# EAGLE board ARE_adaptadores_final (EAGLE 6.1), part 1 of 2
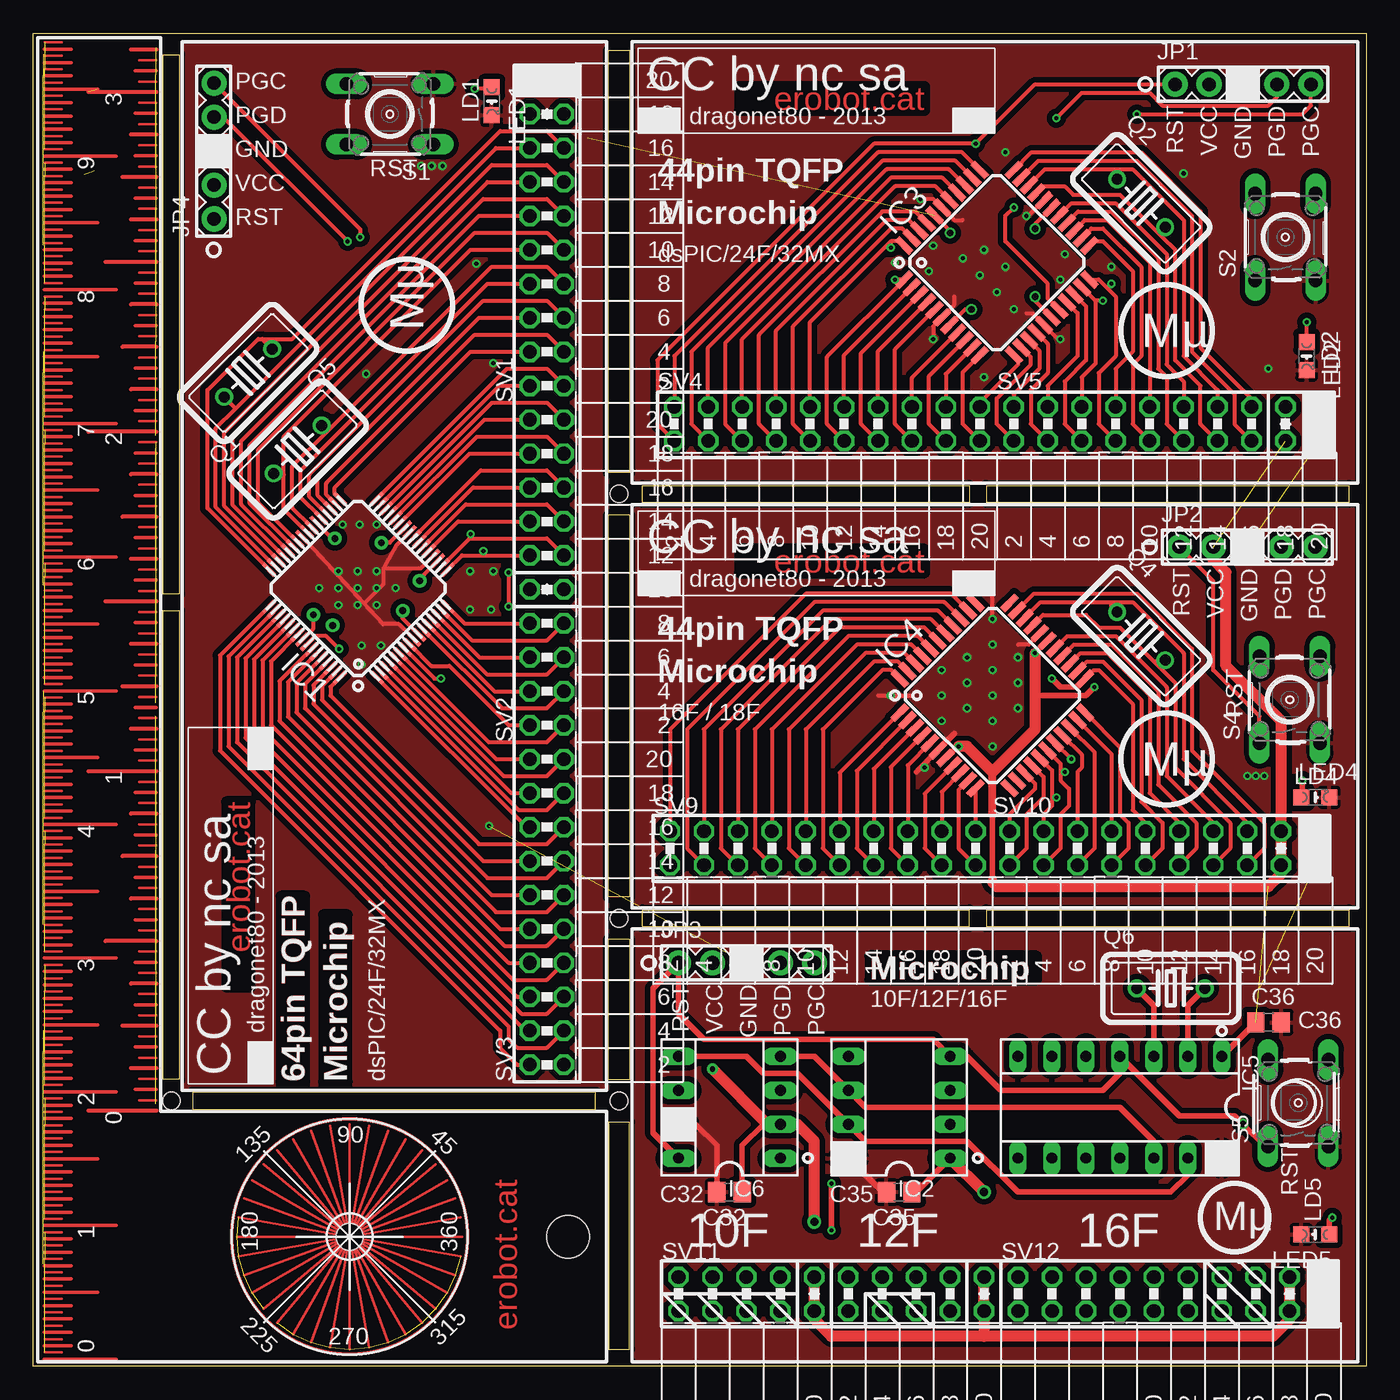
[diagram p0: board, top side]
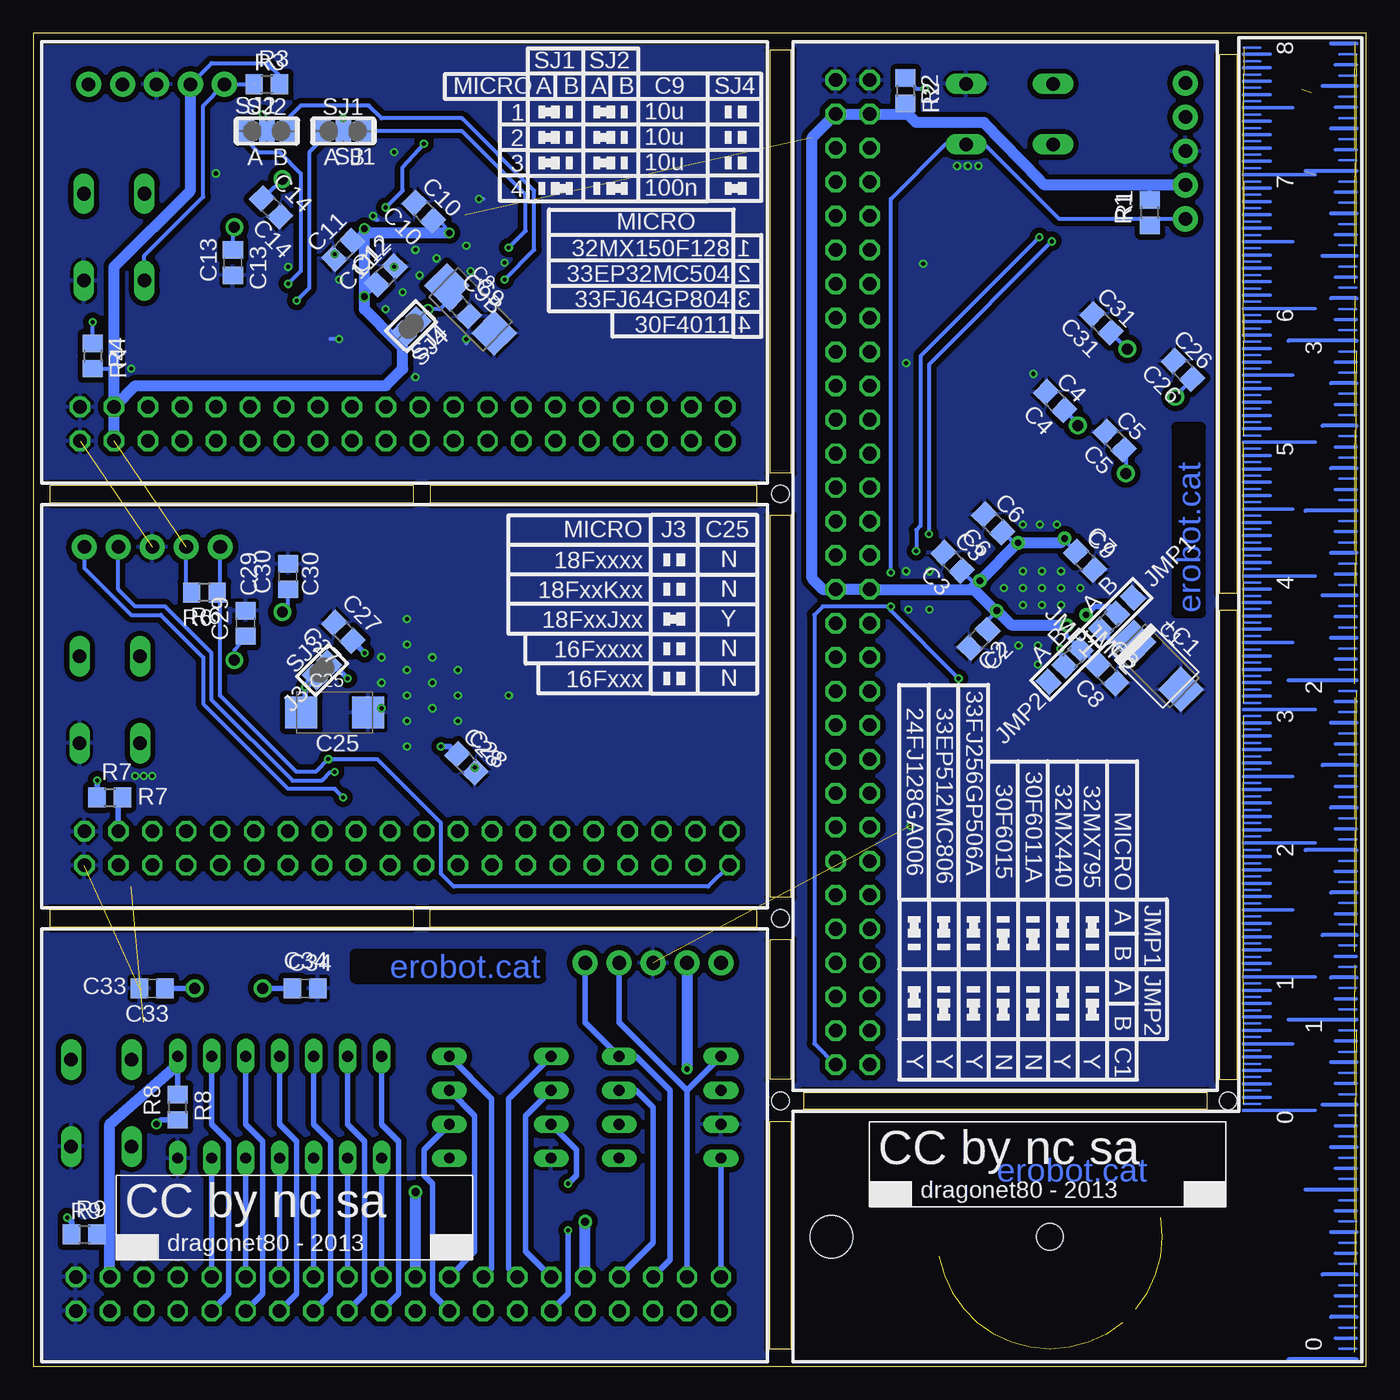
[diagram p1: board, bottom side, seen from below]

Size 99.69 x 99.69 mm. Coordinates in mm from the lower left corner, seen from the top.
Outline: 99.69,99.69 99.69,0 0,0 0,99.69 99.69,99.69
Outline: 9.68,98.11 9.68,57.78 10.95,57.78 10.95,98.11 9.68,98.11
Outline: 9.68,56.52 9.68,21.43 10.95,21.43 10.95,56.52 9.68,56.52
Outline: 11.91,19.21 42.07,19.21 42.07,20.48 11.91,20.48 11.91,19.21
Outline: 43.02,18.26 43.02,1.27 44.61,1.27 44.61,18.26 43.02,18.26
Outline: 43.02,21.43 43.02,31.91 44.61,31.91 44.61,21.43 43.02,21.43
Outline: 43.02,35.08 43.02,63.66 44.61,63.66 44.61,35.08 43.02,35.08
Outline: 43.02,66.83 43.02,98.42 44.61,98.42 44.61,66.83 43.02,66.83
Outline: 45.56,65.88 70.01,65.88 70.01,64.61 45.56,64.61 45.56,65.88
Outline: 71.28,65.88 98.42,65.88 98.42,64.61 71.28,64.61 71.28,65.88
Outline: 45.56,34.13 70.01,34.13 70.01,32.86 45.56,32.86 45.56,34.13
Outline: 71.28,34.13 98.42,34.13 98.42,32.86 71.28,32.86 71.28,34.13
Copper layers (1*16): Top 0.035mm / dielectric 1.5mm / Bottom 0.035mm
Design rules: minimum track width 6mil, minimum drill 12mil, track to track 6mil, track to pad 6mil, pad to pad 6mil, via to via 6mil, smd to smd 0mil, copper to edge 10mil, drill to drill 10mil, minimum pad ring 10mil, minimum via ring 6mil, stop-mask expansion 2mil, vias tented up to drill 100mil, thermal gap 10mil
Holes 3.2 mm at 40.01,9.68
Holes 2 mm at 23.65,9.68
Holes 1.3 mm at 43.81,65.25 43.81,33.5 43.81,19.84 10.32,19.84

## Footprints (pad centres in the part's own frame; a part is rotated, then mirrored left to right if it is on the bottom)
SMC_C = smd 2.4 x 2.4: + -2.5,0; - 2.5,0
C0805 = smd 1.3 x 1.5: 1 -0.95,0; 2 0.95,0
TQFP64-10X10 = smd 1.2 x 0.3: 1 -5.7,3.75; 2 -5.7,3.25; 3 -5.7,2.75; 4 -5.7,2.25; 5 -5.7,1.75; 6 -5.7,1.25; 7 -5.7,0.75; 8 -5.7,0.25; 9 -5.7,-0.25; 10 -5.7,-0.75; 11 -5.7,-1.25; 12 -5.7,-1.75; 13 -5.7,-2.25; 14 -5.7,-2.75; 15 -5.7,-3.25; 16 -5.7,-3.75; 33 5.7,-3.75; 34 5.7,-3.25; 35 5.7,-2.75; 36 5.7,-2.25; 37 5.7,-1.75; 38 5.7,-1.25; 39 5.7,-0.75; 40 5.7,-0.25; 41 5.7,0.25; 42 5.7,0.75; 43 5.7,1.25; 44 5.7,1.75; 45 5.7,2.25; 46 5.7,2.75; 47 5.7,3.25; 48 5.7,3.75 | smd 0.3 x 1.2: 17 -3.75,-5.7; 18 -3.25,-5.7; 19 -2.75,-5.7; 20 -2.25,-5.7; 21 -1.75,-5.7; 22 -1.25,-5.7; 23 -0.75,-5.7; 24 -0.25,-5.7; 25 0.25,-5.7; 26 0.75,-5.7; 27 1.25,-5.7; 28 1.75,-5.7; 29 2.25,-5.7; 30 2.75,-5.7; 31 3.25,-5.7; 32 3.75,-5.7; 49 3.75,5.7; 50 3.25,5.7; 51 2.75,5.7; 52 2.25,5.7; 53 1.75,5.7; 54 1.25,5.7; 55 0.75,5.7; 56 0.25,5.7; 57 -0.25,5.7; 58 -0.75,5.7; 59 -1.25,5.7; 60 -1.75,5.7; 61 -2.25,5.7; 62 -2.75,5.7; 63 -3.25,5.7; 64 -3.75,5.7
SOCKET-08 = drill 0.813 long: 1 -3.81,-3.81; 2 -1.27,-3.81; 3 1.27,-3.81; 4 3.81,-3.81; 5 3.81,3.81; 6 1.27,3.81; 7 -1.27,3.81; 8 -3.81,3.81
TQFP44 = smd 1.5 x 0.5: 1 -5.8,4; 2 -5.8,3.2; 3 -5.8,2.4; 4 -5.8,1.6; 5 -5.8,0.8; 6 -5.8,0; 7 -5.8,-0.8; 8 -5.8,-1.6; 9 -5.8,-2.4; 10 -5.8,-3.2; 11 -5.8,-4; 23 5.8,-4; 24 5.8,-3.2; 25 5.8,-2.4; 26 5.8,-1.6; 27 5.8,-0.8; 28 5.8,0; 29 5.8,0.8; 30 5.8,1.6; 31 5.8,2.4; 32 5.8,3.2; 33 5.8,4 | smd 0.5 x 1.5: 12 -4,-5.8; 13 -3.2,-5.8; 14 -2.4,-5.8; 15 -1.6,-5.8; 16 -0.8,-5.8; 17 0,-5.8; 18 0.8,-5.8; 19 1.6,-5.8; 20 2.4,-5.8; 21 3.2,-5.8; 22 4,-5.8; 34 4,5.8; 35 3.2,5.8; 36 2.4,5.8; 37 1.6,5.8; 38 0.8,5.8; 39 0,5.8; 40 -0.8,5.8; 41 -1.6,5.8; 42 -2.4,5.8; 43 -3.2,5.8; 44 -4,5.8
SOCKET-14 = drill 0.813 long: 1 -7.62,-3.81; 2 -5.08,-3.81; 3 -2.54,-3.81; 4 0,-3.81; 5 2.54,-3.81; 6 5.08,-3.81; 7 7.62,-3.81; 8 7.62,3.81; 9 5.08,3.81; 10 2.54,3.81; 11 0,3.81; 12 -2.54,3.81; 13 -5.08,3.81; 14 -7.62,3.81
A0R-JMP = smd 1.5 x 1.3: 1 0,1.7; 2 0,0; 3 0,-1.7
1X05 = drill 1.016 pad 1.88: 1 0,0; 2 2.54,0; 3 5.08,0; 4 7.62,0; 5 10.16,0
CHIPLED_0805 = smd 1.2 x 1.2: A 0,-1.05; C 0,1.05
HC18U-V = drill 0.813: 1 -2.54,0; 2 2.54,0
R0805 = smd 1.3 x 1.5: 1 -0.95,0; 2 0.95,0
B3F-10XX = drill 1.016 long: 1 -3.251,2.261; 2 3.251,2.261; 3 -3.251,-2.261; 4 3.251,-2.261
SJ_2 = smd 1.168 x 1.6: 1 -1.524,0; 2 0,0; 3 1.524,0
SJ = smd 1.168 x 1.6: 1 -0.762,0; 2 0.762,0
FE10-2W = drill 1.016 octagon: 1 -11.43,1.27; 2 -11.43,-1.27; 3 -8.89,1.27; 4 -8.89,-1.27; 5 -6.35,1.27; 6 -6.35,-1.27; 7 -3.81,1.27; 8 -3.81,-1.27; 9 -1.27,1.27; 10 -1.27,-1.27; 11 1.27,1.27; 12 1.27,-1.27; 13 3.81,1.27; 14 3.81,-1.27; 15 6.35,1.27; 16 6.35,-1.27; 17 8.89,1.27; 18 8.89,-1.27; 19 11.43,1.27; 20 11.43,-1.27

## Placement (x,y rotation side)
C1  10uF  [SMC_C]  15.61,52.39 315 bottom
C2  100n  [C0805]  28.97,54.39 225 bottom
C3  100n  [C0805]  30.94,60.17 135 bottom
C4  18p  [C0805]  23.26,72.19 135 bottom
C5  18p  [C0805]  18.8,69.23 135 bottom
C6  100n  [C0805]  27.89,63.03 135 bottom
C7  100n  [C0805]  21.03,60.24 315 bottom
C8  100n  [C0805]  19.37,51.75 315 bottom
C9  10uF  [SMC_C]  66.99,79.06 315 bottom
C9B  100n  [C0805]  67.79,79.22 315 bottom
C10  100n  [C0805]  70.48,86.36 135 bottom
C11  100n  [C0805]  76.52,83.5 225 bottom
C12  100n  [C0805]  73.34,81.6 45 bottom
C13  18p  [C0805]  84.77,82.55 270 bottom
C14  18p  [C0805]  81.92,86.68 315 bottom
C25  10uF  [SMC_C]  77.15,48.9 0 bottom
C26  18p  [C0805]  13.7,74.53 135 bottom
C27  100n  [C0805]  76.52,54.93 135 bottom
C28  100n  [C0805]  67.31,45.09 315 bottom
C29  18p  [C0805]  83.82,55.56 90 bottom
C30  18p  [C0805]  80.64,59.05 90 bottom
C31  18p  [C0805]  19.78,78.02 135 bottom
C32  100n  [C0805]  52.07,13.02 180 top
C33  18p  [C0805]  90.81,28.26 180 bottom
C34  18p  [C0805]  79.38,28.26 0 bottom
C35  100n  [C0805]  64.77,13.02 180 top
C36  100n  [C0805]  92.39,25.72 0 top
IC1  PIC32MX  [TQFP64-10X10]  24.31,58.19 135 top
IC2  12F  [SOCKET-08]  64.77,19.37 90 top
IC3  PIC24FJ32GA004  [TQFP44]  72.07,82.55 45 top
IC4  PIC16F1517/19PT  [TQFP44]  71.75,50.16 45 top
IC5  16F  [SOCKET-14]  81.28,19.37 180 top
IC6  10F  [SOCKET-08]  52.07,19.37 90 top
JMP1  0R-JUMPA  [A0R-JMP]  18.64,56.29 135 bottom
JMP2  0R-JUMPA  [A0R-JMP]  22.54,52.39 315 bottom
JP1  [1X05]  85.41,95.89 0 top
JP2  [1X05]  85.72,61.28 0 top
JP3  [1X05]  48.26,30.16 0 top
JP4  [1X05]  13.51,85.81 90 top
LED1  [CHIPLED_0805]  34.29,94.61 180 top
LED2  [CHIPLED_0805]  95.25,75.56 180 top
LED4  [CHIPLED_0805]  95.89,42.55 270 top
LED5  [CHIPLED_0805]  95.89,9.84 90 top
Q1  [HC18U-V]  19.77,68.57 45 top
Q2  [HC18U-V]  82.87,87 315 top
Q4  [HC18U-V]  82.87,54.61 315 top
Q5  [HC18U-V]  16.06,74.3 225 top
Q6  [HC18U-V]  85.09,28.26 0 top
R1  4K7  [R0805]  16.17,86.29 90 bottom
R2  1K  [R0805]  34.45,95.41 270 bottom
R3  4K7  [R0805]  82.23,95.89 0 bottom
R4  1K  [R0805]  95.25,75.56 270 bottom
R6  4K7  [R0805]  86.9,57.88 180 bottom
R7  1K  [R0805]  93.98,42.55 0 bottom
R8  4K7  [R0805]  88.9,19.37 90 bottom
R9  1K  [R0805]  95.89,9.84 0 bottom
S1  [B3F-10XX]  26.67,93.66 180 top
S2  [B3F-10XX]  93.66,84.45 90 top
S4  [B3F-10XX]  93.98,49.85 90 top
S5  [B3F-10XX]  94.61,19.68 90 top
SJ1  [SJ_2]  76.52,92.39 180 bottom
SJ2  [SJ_2]  82.23,92.39 0 bottom
SJ3  [SJ]  78.11,52.07 45 bottom
SJ4  [SJ]  71.44,77.79 225 bottom
SV1  [FE10-2W]  38.42,84.77 90 top
SV2  [FE10-2W]  38.42,59.37 90 top
SV3  [FE10-2W]  38.42,33.97 90 top
SV4  [FE10-2W]  59.37,70.48 0 top
SV5  [FE10-2W]  84.77,70.48 0 top
SV9  [FE10-2W]  59.05,38.73 0 top
SV10  [FE10-2W]  84.45,38.73 0 top
SV11  [FE10-2W]  59.69,5.4 0 top
SV12  [FE10-2W]  85.09,5.4 0 top

## Library data of the parts
C1-C9 C9B C10-C14 C25-C36 R1-R4 R6-R9 = rcl
IC1 = microchip_nuevo
IC2 IC5 IC6 = ic-package
IC3 = microchip; MPN: PIC24FJ32GA004-E/PT; OC_FARNELL: 1332295; OC_NEWARK: 98M1915
IC4 = microchip
JMP1 JMP2 = jump-0r-smd
JP1-JP4 = SparkFun
LED1 LED2 LED4 LED5 = led
Q1 Q2 Q4-Q6 = crystal; OC_FARNELL: unknown; OC_NEWARK: unknown
S1 S2 S4 S5 = switch-omron; MPN: B3F-1000; OC_FARNELL: 176432; OC_NEWARK: 36M3542
SJ1-SJ4 = jumper
SV1-SV5 SV9-SV12 = con-lsta; OC_FARNELL: unknown; OC_NEWARK: unknown

## Nets
MCLR: IC1.7 JP4.1 R1.1 S1.1 SV3.2
N$1: LED1.A R2.1
N$2: LED2.A R4.1
N$4: LED4.A R7.1
N$5: C1.+ JMP1.1
N$8: LED5.A R9.1
N$9: IC6.1
N$11: C9.+ C9B.1 IC3.7 SJ4.1
N$14: IC6.6
P1: IC1.1 SV3.15
P1OSC1: C4.1 IC1.39 Q1.2 SV1.8
P1OSC2: C5.1 IC1.40 Q1.1 SV1.9
P1SOSCI: C26.1 IC1.47 Q5.2 SV1.15
P1SOSCO: C31.1 IC1.48 Q5.1 SV1.16
P2: IC1.2 SV3.18
P2GC: JP1.5 SJ2.2
P2GD: JP1.4 SJ1.2
P2MCLR: IC3.18 JP1.1 R3.1 S2.1 SV4.2
P2OSC1: C13.1 IC3.30 Q2.2 SV5.14
P2OSC2: C14.1 IC3.31 Q2.1 SV5.13
P3: IC1.3 SV3.17
P4: IC1.4 SV3.20
P4GC: IC4.16 JP2.5 SV10.3
P4GD: IC4.17 JP2.4 SV10.4
P4MCLR: IC4.18 JP2.1 R6.1 S4.1 SV9.2
P4OSC1: C29.1 IC4.30 Q4.2 SV10.14
P4OSC2: C30.1 IC4.31 Q4.1 SV10.15
P5: IC1.5 SV3.19
P5GC: IC2.6 IC5.12 IC6.4 JP3.5 SV11.5 SV11.11 SV12.9
P5GD: IC2.7 IC5.13 IC6.5 JP3.4 SV11.3 SV11.12 SV12.11
P5MCLR: IC2.4 IC5.4 IC6.8 JP3.1 R8.1 S5.1 SV11.1 SV11.15 SV12.8
P5OSC1: C33.1 IC5.2 Q6.2 SV12.12
P5OSC2: C34.1 IC5.3 Q6.1 SV12.10
P6: IC1.6 SV2.2
P8: IC1.8 SV2.1
P11: IC1.11 SV2.4
P12: IC1.12 SV2.3
P13: IC1.13 SV2.6
P14: IC1.14 SV2.5
P15: IC1.15 SV2.8
P16: IC1.16 SV2.7
P21: IC1.21 SV2.13
P22: IC1.22 SV2.14
P23: IC1.23 SV2.15
P24: IC1.24 SV2.16
P27: IC1.27 SV2.17
P28: IC1.28 SV2.18
P29: IC1.29 SV2.19
P30: IC1.30 SV2.20
P31: IC1.31 SV1.1
P32: IC1.32 SV1.2
P33: IC1.33 SV1.3
P34: IC1.34 SV1.4
P35: IC1.35 SV1.5
P36: IC1.36 SV1.6
P37: IC1.37 SV1.7
P42: IC1.42 SV1.10
P43: IC1.43 SV1.11
P44: IC1.44 SV1.12
P45: IC1.45 SV1.13
P46: IC1.46 SV1.14
P49: IC1.49 SV3.1
P50: IC1.50 SV3.4
P51: IC1.51 SV3.3
P52: IC1.52 SV3.6
P53: IC1.53 SV3.5
P54: IC1.54 SV3.8
P55: IC1.55 SV3.7
P58: IC1.58 SV3.10
P59: IC1.59 SV3.9
P60: IC1.60 SV3.12
P61: IC1.61 SV3.11
P62: IC1.62 SV3.14
P63: IC1.63 SV3.13
P64: IC1.64 SV3.16
P201: IC3.34 SV4.1
P203: IC3.36 SV4.3
P204: IC3.35 SV4.4
P205: IC3.38 SV4.5
P206: IC3.37 SV4.6
P207: IC3.42 SV4.7
P208: IC3.41 SV4.8
P209: IC3.44 SJ1.1 SV4.9
P210: IC3.43 SV4.10
P211: IC3.2 SV4.11
P212: IC3.1 SJ2.3 SV4.12
P213: IC3.4 SV4.13
P214: IC3.3 SV4.14
P215: IC3.8 SV4.15
P216: IC3.5 SV4.16
P217: IC3.10 SV4.17
P218: IC3.9 SV4.18
P219: IC3.12 SV4.19
P220: IC3.11 SV4.20
P221: IC3.14 SV5.1
P222: IC3.13 SV5.2
P223: IC3.19 SV5.3
P224: IC3.15 SV5.4
P225: IC3.21 SJ1.3 SV5.5
P226: IC3.20 SV5.6
P227: IC3.23 SV5.7
P228: IC3.22 SJ2.1 SV5.8
P229: IC3.25 SV5.9
P230: IC3.24 SV5.10
P231: IC3.27 SV5.11
P232: IC3.26 SV5.12
P235: IC3.33 SV5.15
P236: IC3.32 SV5.16
P401: IC4.35 SV9.1
P403: IC4.37 SV9.3
P404: IC4.36 SV9.4
P405: IC4.39 SV9.5
P406: IC4.38 SV9.6
P407: IC4.41 SV9.7
P408: IC4.40 SV9.8
P409: IC4.43 SV9.9
P410: IC4.42 SV9.10
P411: IC4.1 SV9.11
P412: IC4.44 SV9.12
P413: IC4.3 SV9.13
P414: IC4.2 SV9.14
P415: IC4.5 SV9.15
P416: IC4.4 SV9.16
P417: IC4.9 SV9.17
P418: IC4.8 SV9.18
P419: IC4.11 SV9.19
P420: IC4.10 SV9.20
P421: IC4.14 SV10.1
P422: IC4.15 SV10.2
P425: IC4.19 SV10.5
P426: IC4.20 SV10.6
P427: IC4.21 SV10.7
P428: IC4.22 SV10.8
P429: IC4.23 SJ3.2 SV10.9
P430: IC4.24 SV10.10
P431: IC4.25 SV10.11
P432: IC4.26 SV10.12
P433: IC4.27 SV10.13
P436: IC4.32 SV10.16
P502: SV11.2
P504: SV11.4
P506: SV11.6
P507: IC6.3 SV11.7
P508: SV11.8
P513: IC2.5 SV11.13
P514: SV11.14
P516: SV11.16
P517: IC2.3 SV11.17
P518: IC2.2 SV11.18
P521: IC5.8 SV12.1
P522: IC5.7 SV12.2
P523: IC5.9 SV12.3
P524: IC5.6 SV12.4
P525: IC5.10 SV12.5
P526: IC5.5 SV12.6
P527: IC5.11 SV12.7
P533: SV12.13
P534: SV12.14
P535: SV12.15
P536: SV12.16
PGC: IC1.17 JP4.5 SV2.11
PGD: IC1.18 JP4.4 SV2.12
VCAP: IC1.56 JMP1.2
VCC: C2.1 C3.1 C6.1 C7.1 C8.1 C10.1 C11.1 C12.1 C25.+ C27.1 C28.1 C32.1 C35.1 C36.1 IC1.10 IC1.19 IC1.26 IC1.38 IC2.1 IC3.17 IC3.28 IC3.40 IC4.7 IC4.28 IC5.1 IC6.2 JMP2.1 JP1.2 JP2.2 JP3.2 JP4.2 R1.2 R2.2 R3.2 R4.2 R6.2 R7.2 R8.2 R9.2 SJ3.1 SJ4.2 SV1.17 SV1.18 SV2.9 SV2.10 SV5.17 SV5.18 SV10.17 SV10.18 SV11.9 SV11.10 SV11.19 SV11.20 SV12.17 SV12.18
VREG: IC1.57 JMP2.2
VSS: C1.- C2.2 C3.2 C4.2 C5.2 C6.2 C7.2 C8.2 C9.- C9B.2 C10.2 C11.2 C12.2 C13.2 C14.2 C25.- C26.2 C27.2 C28.2 C29.2 C30.2 C31.2 C32.2 C33.2 C34.2 C35.2 C36.2 IC1.9 IC1.20 IC1.25 IC1.41 IC2.8 IC3.6 IC3.16 IC3.29 IC3.39 IC4.6 IC4.29 IC5.14 IC6.7 JMP1.3 JMP2.3 JP1.3 JP2.3 JP3.3 JP4.3 LED1.C LED2.C LED4.C LED5.C S1.3 S2.3 S4.3 S5.3 SV1.19 SV1.20 SV5.19 SV5.20 SV10.19 SV10.20 SV12.19 SV12.20